# Altium PCB LedMatrix.PcbDoc (part 3 of 3)
Units mm, origin at the board's own origin, x right, y up, seen from the top; angles counter-clockwise.
Board outline 35.93 x 53 mm, 2 copper layers (Top Layer, Bottom Layer), stack 1.611 mm thick; 215 components, 212 nets, 670 pads, 259 vias.
Unrouted connection lines stored in the file: 107.
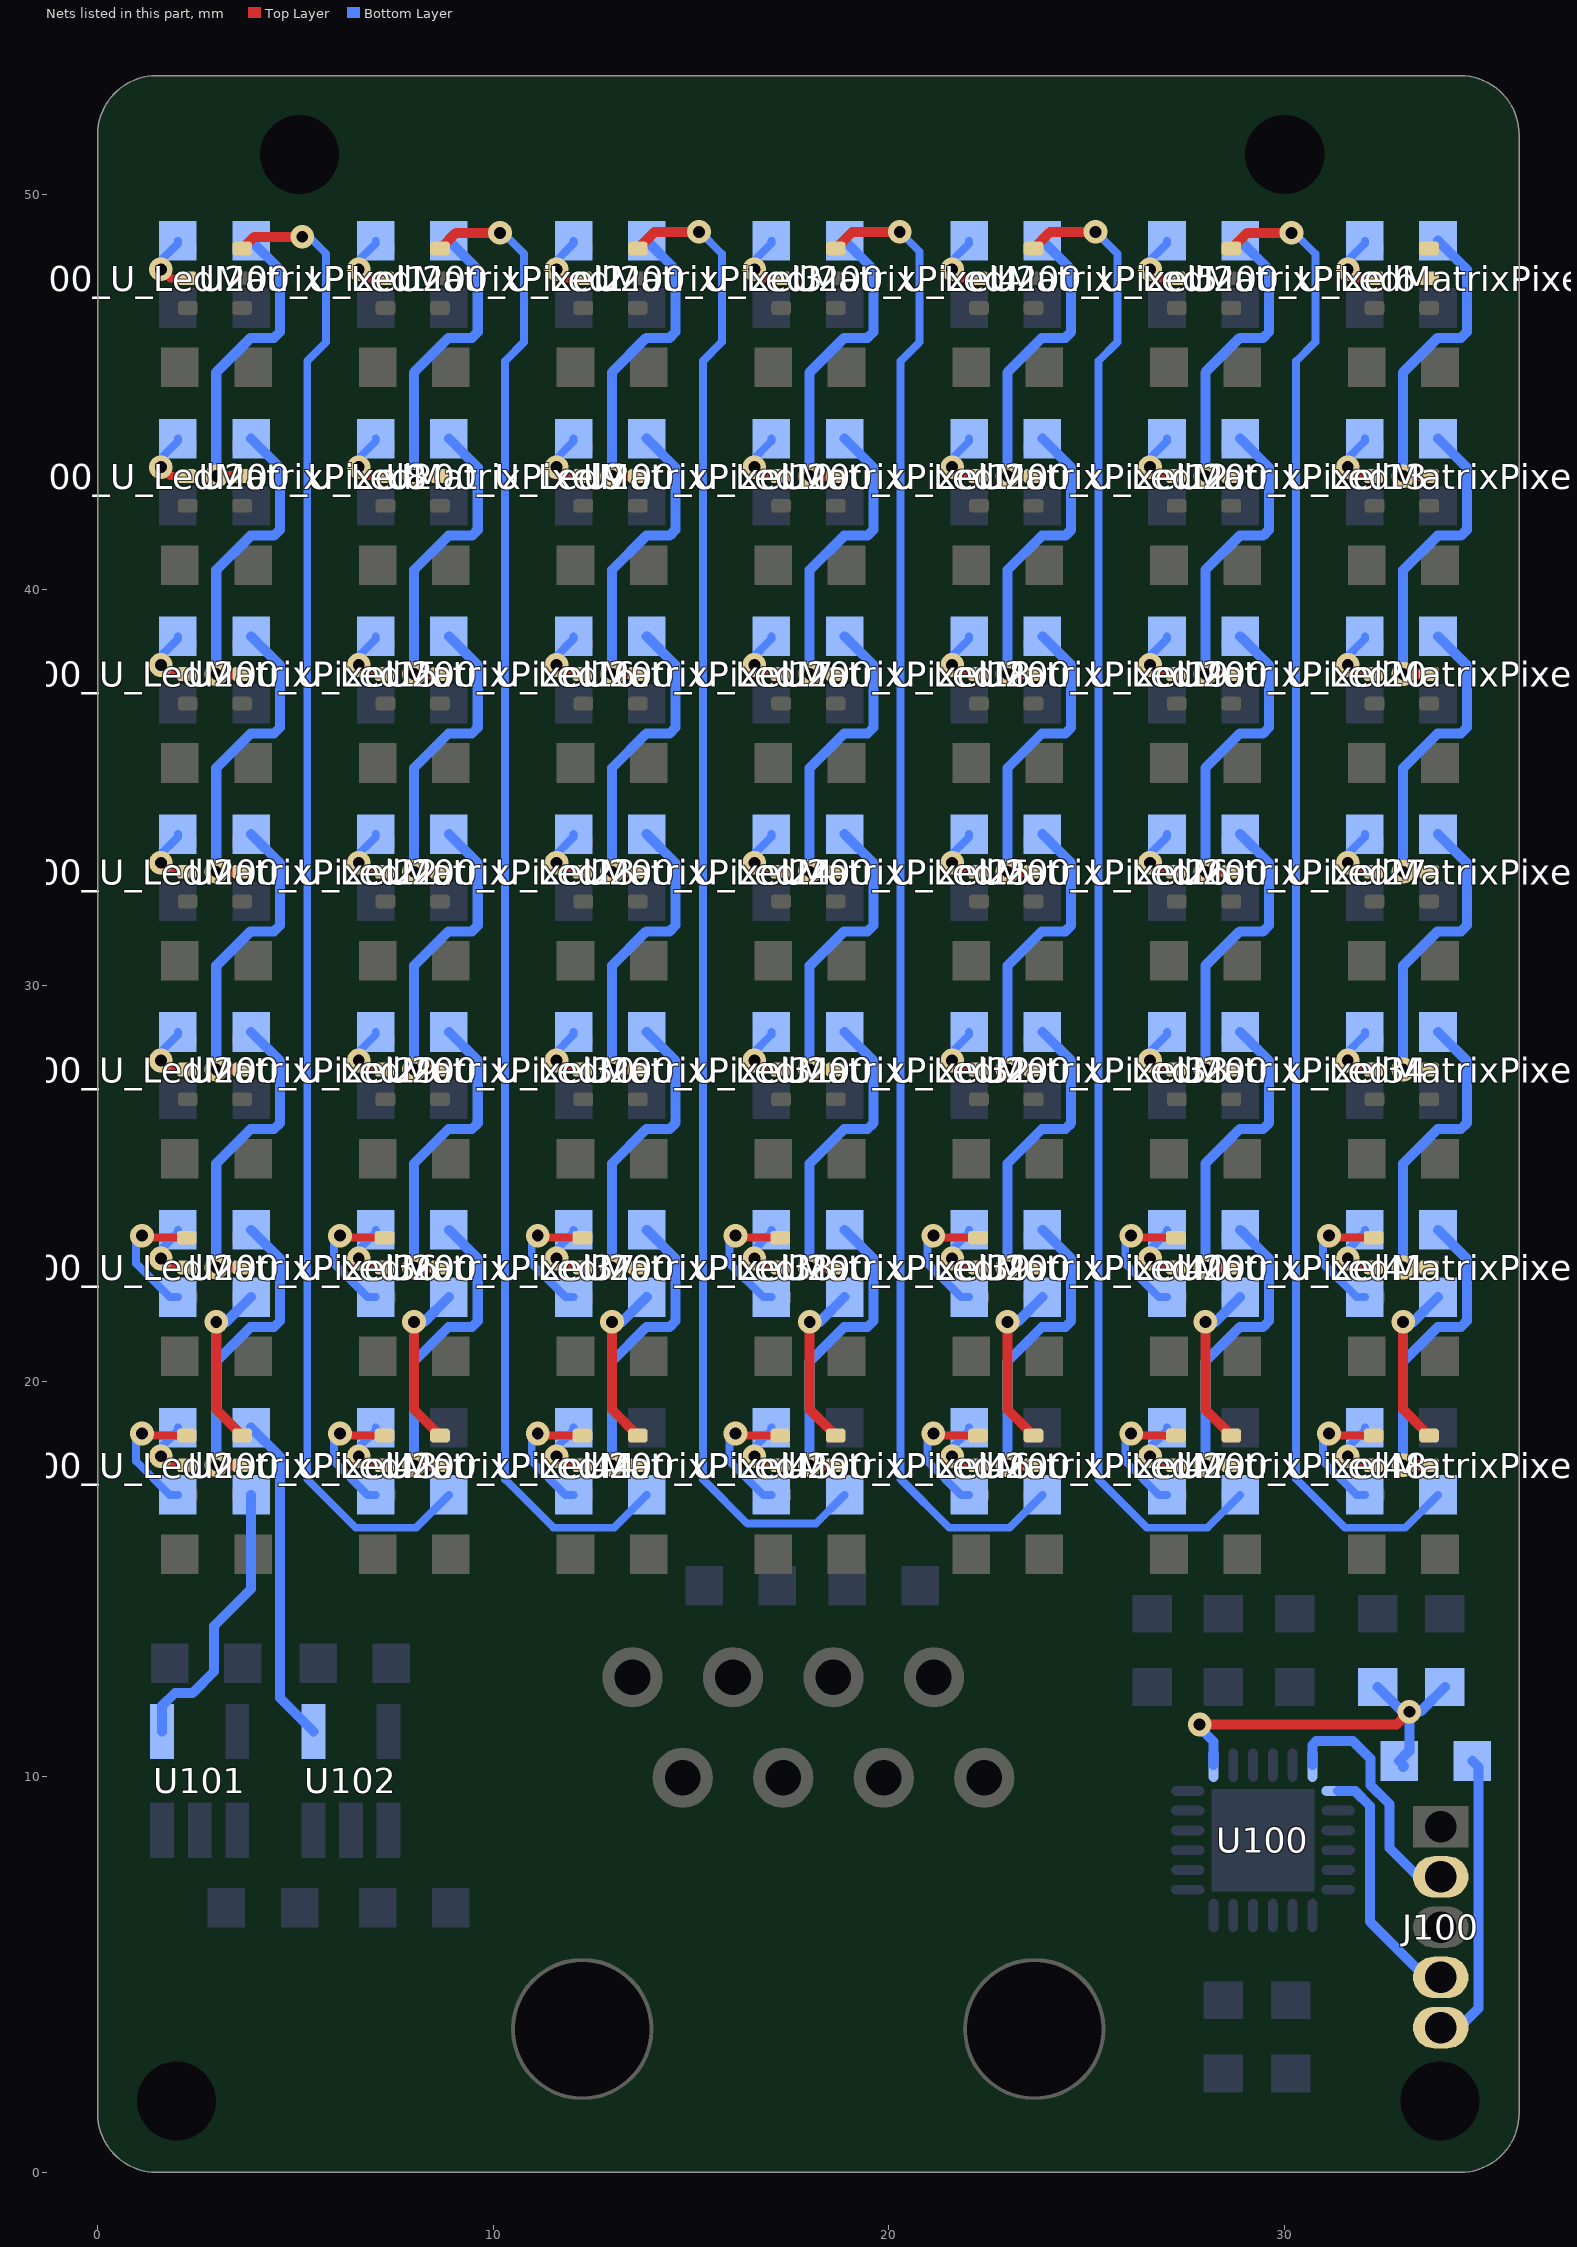
[diagram p3: the nets of this part, all layers, seen from the top]

## Via types
v1: diameter 0.6, hole 0.3, Top Layer to Bottom Layer, tented both sides, 255 vias
v2: diameter 0.5, hole 0.2, Top Layer to Bottom Layer, tented both sides, 4 vias

## Nets (pads, with @x,y where several pads share a name; then routed paths per layer and width w, separated by ;. In a path a pad name is that pad's centre, name@x,y a point inside that pad or via, vN(x,y) a via of type N, cw(c..) or ccw(c..) an arc to the next point about the centre after c; other vN are vias at no path point) (continued)
NetR200_U_LedMatrixPixel36_1: R200_U_LedMatrixPixel36.1 U200_U_LedMatrixPixel43.6 | length 4.3
  Top Layer w0.254: v1(3,21.5) 3,19.281 U200_U_LedMatrixPixel43.6@3.656,18.625
  Bottom Layer w0.254: v1(3,21.5) 3.256,21.5 R200_U_LedMatrixPixel36.1@3.881,22.125
NetR200_U_LedMatrixPixel36_2: R200_U_LedMatrixPixel36.2 U200_U_LedMatrixPixel36.1 | length 3.3
  Top Layer w0.2: v1(1.125,23.677) 1.125,23.65 1.15,23.625 1.378,23.625 1.382,23.629 2.252,23.629 U200_U_LedMatrixPixel36.1@2.256,23.625
  Bottom Layer w0.2: v1(1.125,23.677) 0.975,23.527 0.975,22.975 1.825,22.125 R200_U_LedMatrixPixel36.2@2.031,22.125
NetR200_U_LedMatrixPixel37_1: R200_U_LedMatrixPixel37.1 U200_U_LedMatrixPixel44.6 | length 4.3
  Top Layer w0.254: v1(8,21.5) 8,19.281 U200_U_LedMatrixPixel44.6@8.656,18.625
  Bottom Layer w0.254: v1(8,21.5) 8.256,21.5 R200_U_LedMatrixPixel37.1@8.881,22.125
NetR200_U_LedMatrixPixel37_2: R200_U_LedMatrixPixel37.2 U200_U_LedMatrixPixel37.1 | length 3.3
  Top Layer w0.2: v1(6.125,23.677) 6.125,23.65 6.15,23.625 6.378,23.625 6.382,23.629 7.252,23.629 U200_U_LedMatrixPixel37.1@7.256,23.625
  Bottom Layer w0.2: v1(6.125,23.677) 5.975,23.527 5.975,22.975 6.825,22.125 R200_U_LedMatrixPixel37.2@7.031,22.125
NetR200_U_LedMatrixPixel38_1: R200_U_LedMatrixPixel38.1 U200_U_LedMatrixPixel45.6 | length 4.3
  Top Layer w0.254: v1(13,21.5) 13,19.281 U200_U_LedMatrixPixel45.6@13.656,18.625
  Bottom Layer w0.254: v1(13,21.5) 13.256,21.5 R200_U_LedMatrixPixel38.1@13.881,22.125
NetR200_U_LedMatrixPixel38_2: R200_U_LedMatrixPixel38.2 U200_U_LedMatrixPixel38.1 | length 3.3
  Top Layer w0.2: v1(11.125,23.677) 11.125,23.65 11.15,23.625 11.378,23.625 11.382,23.629 12.252,23.629 U200_U_LedMatrixPixel38.1@12.256,23.625
  Bottom Layer w0.2: v1(11.125,23.677) 10.975,23.527 10.975,22.975 11.825,22.125 R200_U_LedMatrixPixel38.2@12.031,22.125
NetR200_U_LedMatrixPixel39_1: R200_U_LedMatrixPixel39.1 U200_U_LedMatrixPixel46.6 | length 4.3
  Top Layer w0.254: v1(18,21.5) 18,19.281 U200_U_LedMatrixPixel46.6@18.656,18.625
  Bottom Layer w0.254: v1(18,21.5) 18.256,21.5 R200_U_LedMatrixPixel39.1@18.881,22.125
NetR200_U_LedMatrixPixel39_2: R200_U_LedMatrixPixel39.2 U200_U_LedMatrixPixel39.1 | length 3.3
  Top Layer w0.2: v1(16.125,23.677) 16.125,23.65 16.15,23.625 16.378,23.625 16.382,23.629 17.252,23.629 U200_U_LedMatrixPixel39.1@17.256,23.625
  Bottom Layer w0.2: v1(16.125,23.677) 15.975,23.527 15.975,22.975 16.825,22.125 R200_U_LedMatrixPixel39.2@17.031,22.125
NetR200_U_LedMatrixPixel40_1: R200_U_LedMatrixPixel40.1 U200_U_LedMatrixPixel47.6 | length 4.3
  Top Layer w0.254: v1(23,21.5) 23,19.281 U200_U_LedMatrixPixel47.6@23.656,18.625
  Bottom Layer w0.254: v1(23,21.5) 23.256,21.5 R200_U_LedMatrixPixel40.1@23.881,22.125
NetR200_U_LedMatrixPixel40_2: R200_U_LedMatrixPixel40.2 U200_U_LedMatrixPixel40.1 | length 3.3
  Top Layer w0.2: v1(21.125,23.677) 21.125,23.65 21.15,23.625 21.378,23.625 21.382,23.629 22.252,23.629 U200_U_LedMatrixPixel40.1@22.256,23.625
  Bottom Layer w0.2: v1(21.125,23.677) 20.975,23.527 20.975,22.975 21.825,22.125 R200_U_LedMatrixPixel40.2@22.031,22.125
NetR200_U_LedMatrixPixel41_1: R200_U_LedMatrixPixel41.1 U200_U_LedMatrixPixel48.6 | length 4.3
  Top Layer w0.254: v1(28,21.5) 28,19.281 U200_U_LedMatrixPixel48.6@28.656,18.625
  Bottom Layer w0.254: v1(28,21.5) 28.256,21.5 R200_U_LedMatrixPixel41.1@28.881,22.125
NetR200_U_LedMatrixPixel41_2: R200_U_LedMatrixPixel41.2 U200_U_LedMatrixPixel41.1 | length 3.3
  Top Layer w0.2: v1(26.125,23.677) 26.125,23.65 26.15,23.625 26.378,23.625 26.382,23.629 27.252,23.629 U200_U_LedMatrixPixel41.1@27.256,23.625
  Bottom Layer w0.2: v1(26.125,23.677) 25.975,23.527 25.975,22.975 26.825,22.125 R200_U_LedMatrixPixel41.2@27.031,22.125
NetR200_U_LedMatrixPixel42_1: R200_U_LedMatrixPixel42.1 U200_U_LedMatrixPixel49.6 | length 4.3
  Top Layer w0.254: v1(33,21.5) 33,19.281 U200_U_LedMatrixPixel49.6@33.656,18.625
  Bottom Layer w0.254: v1(33,21.5) 33.256,21.5 R200_U_LedMatrixPixel42.1@33.881,22.125
NetR200_U_LedMatrixPixel42_2: R200_U_LedMatrixPixel42.2 U200_U_LedMatrixPixel42.1 | length 3.3
  Top Layer w0.2: v1(31.125,23.677) 31.125,23.65 31.15,23.625 31.378,23.625 31.382,23.629 32.252,23.629 U200_U_LedMatrixPixel42.1@32.256,23.625
  Bottom Layer w0.2: v1(31.125,23.677) 30.975,23.527 30.975,22.975 31.825,22.125 R200_U_LedMatrixPixel42.2@32.031,22.125
NetR200_U_LedMatrixPixel43_1: R200_U_LedMatrixPixel43.1 U101.4 | length 7.2
  Bottom Layer w0.254: U101.4@1.631,11.145 1.631,11.797 1.955,12.121 2.405,12.121 2.946,12.662 2.946,13.81 3.881,14.745 R200_U_LedMatrixPixel43.1@3.881,17.125
NetR200_U_LedMatrixPixel43_2: R200_U_LedMatrixPixel43.2 U200_U_LedMatrixPixel43.1 | length 3.3
  Top Layer w0.2: v1(1.125,18.677) 1.125,18.65 1.15,18.625 1.378,18.625 1.382,18.629 2.252,18.629 U200_U_LedMatrixPixel43.1@2.256,18.625
  Bottom Layer w0.2: v1(1.125,18.677) 0.975,18.527 0.975,17.975 1.825,17.125 R200_U_LedMatrixPixel43.2@2.031,17.125
NetR200_U_LedMatrixPixel44_2: R200_U_LedMatrixPixel44.2 U200_U_LedMatrixPixel44.1 | length 3.3
  Top Layer w0.2: v1(6.125,18.677) 6.125,18.65 6.15,18.625 6.378,18.625 6.382,18.629 7.252,18.629 U200_U_LedMatrixPixel44.1@7.256,18.625
  Bottom Layer w0.2: v1(6.125,18.677) 5.975,18.527 5.975,17.975 6.825,17.125 R200_U_LedMatrixPixel44.2@7.031,17.125
NetR200_U_LedMatrixPixel45_2: R200_U_LedMatrixPixel45.2 U200_U_LedMatrixPixel45.1 | length 3.3
  Top Layer w0.2: v1(11.125,18.677) 11.125,18.65 11.15,18.625 11.378,18.625 11.382,18.629 12.252,18.629 U200_U_LedMatrixPixel45.1@12.256,18.625
  Bottom Layer w0.2: v1(11.125,18.677) 10.975,18.527 10.975,17.975 11.825,17.125 R200_U_LedMatrixPixel45.2@12.031,17.125
NetR200_U_LedMatrixPixel46_2: R200_U_LedMatrixPixel46.2 U200_U_LedMatrixPixel46.1 | length 3.3
  Top Layer w0.2: v1(16.125,18.677) 16.125,18.65 16.15,18.625 16.378,18.625 16.382,18.629 17.252,18.629 U200_U_LedMatrixPixel46.1@17.256,18.625
  Bottom Layer w0.2: v1(16.125,18.677) 15.975,18.527 15.975,17.975 16.825,17.125 R200_U_LedMatrixPixel46.2@17.031,17.125
NetR200_U_LedMatrixPixel47_2: R200_U_LedMatrixPixel47.2 U200_U_LedMatrixPixel47.1 | length 3.3
  Top Layer w0.2: v1(21.125,18.677) 21.125,18.65 21.15,18.625 21.378,18.625 21.382,18.629 22.252,18.629 U200_U_LedMatrixPixel47.1@22.256,18.625
  Bottom Layer w0.2: v1(21.125,18.677) 20.975,18.527 20.975,17.975 21.825,17.125 R200_U_LedMatrixPixel47.2@22.031,17.125
NetR200_U_LedMatrixPixel48_2: R200_U_LedMatrixPixel48.2 U200_U_LedMatrixPixel48.1 | length 3.3
  Top Layer w0.2: v1(26.125,18.677) 26.125,18.65 26.15,18.625 26.378,18.625 26.382,18.629 27.252,18.629 U200_U_LedMatrixPixel48.1@27.256,18.625
  Bottom Layer w0.2: v1(26.125,18.677) 25.975,18.527 25.975,17.975 26.825,17.125 R200_U_LedMatrixPixel48.2@27.031,17.125
NetR200_U_LedMatrixPixel49_2: R200_U_LedMatrixPixel49.2 U200_U_LedMatrixPixel49.1 | length 3.3
  Top Layer w0.2: v1(31.125,18.677) 31.125,18.65 31.15,18.625 31.378,18.625 31.382,18.629 32.252,18.629 U200_U_LedMatrixPixel49.1@32.256,18.625
  Bottom Layer w0.2: v1(31.125,18.677) 30.975,18.527 30.975,17.975 31.825,17.125 R200_U_LedMatrixPixel49.2@32.031,17.125
NetR201_U_LedMatrixPixel1_1: R201_U_LedMatrixPixel1.1 U200_U_LedMatrixPixel8.5 | length 7.9
  Top Layer w0.254: v1(3,42.875) U200_U_LedMatrixPixel8.5@3.656,42.875
  Bottom Layer w0.254: v1(3,42.875) 3,45.5 3.871,46.371 4.461,46.371 4.61,46.52 4.61,48.096 R201_U_LedMatrixPixel1.1@3.881,48.825
NetR201_U_LedMatrixPixel1_2: R201_U_LedMatrixPixel1.2 U200_U_LedMatrixPixel1.2 | length 1.8
  Top Layer w0.2: v1@1.527,48.102 v1(1.6,48.102) 1.827,47.875 U200_U_LedMatrixPixel1.2@2.256,47.875
  Bottom Layer w0.2: v1(1.6,48.102) 1.6,48.181 1.528,48.253 2.031,48.756 R201_U_LedMatrixPixel1.2@2.031,48.825
NetR201_U_LedMatrixPixel2_1: R201_U_LedMatrixPixel2.1 U200_U_LedMatrixPixel9.5 | length 7.9
  Top Layer w0.254: v1(8,42.875) U200_U_LedMatrixPixel9.5@8.656,42.875
  Bottom Layer w0.254: v1(8,42.875) 8,45.5 8.871,46.371 9.461,46.371 9.61,46.52 9.61,48.096 R201_U_LedMatrixPixel2.1@8.881,48.825
NetR201_U_LedMatrixPixel2_2: R201_U_LedMatrixPixel2.2 U200_U_LedMatrixPixel2.2 | length 1.8
  Top Layer w0.2: v1@6.527,48.102 v1(6.6,48.102) 6.827,47.875 U200_U_LedMatrixPixel2.2@7.256,47.875
  Bottom Layer w0.2: v1(6.6,48.102) 6.6,48.181 6.528,48.253 7.031,48.756 R201_U_LedMatrixPixel2.2@7.031,48.825
NetR201_U_LedMatrixPixel3_1: R201_U_LedMatrixPixel3.1 U200_U_LedMatrixPixel10.5 | length 7.9
  Top Layer w0.254: v1(13,42.875) U200_U_LedMatrixPixel10.5@13.656,42.875
  Bottom Layer w0.254: v1(13,42.875) 13,45.5 13.871,46.371 14.461,46.371 14.61,46.52 14.61,48.096 R201_U_LedMatrixPixel3.1@13.881,48.825
NetR201_U_LedMatrixPixel3_2: R201_U_LedMatrixPixel3.2 U200_U_LedMatrixPixel3.2 | length 1.8
  Top Layer w0.2: v1@11.527,48.102 v1(11.6,48.102) 11.827,47.875 U200_U_LedMatrixPixel3.2@12.256,47.875
  Bottom Layer w0.2: v1(11.6,48.102) 11.6,48.181 11.528,48.253 12.031,48.756 R201_U_LedMatrixPixel3.2@12.031,48.825
NetR201_U_LedMatrixPixel4_1: R201_U_LedMatrixPixel4.1 U200_U_LedMatrixPixel11.5 | length 7.9
  Top Layer w0.254: v1(18,42.875) U200_U_LedMatrixPixel11.5@18.656,42.875
  Bottom Layer w0.254: v1(18,42.875) 18,45.5 18.871,46.371 19.461,46.371 19.61,46.52 19.61,48.096 R201_U_LedMatrixPixel4.1@18.881,48.825
NetR201_U_LedMatrixPixel4_2: R201_U_LedMatrixPixel4.2 U200_U_LedMatrixPixel4.2 | length 1.8
  Top Layer w0.2: v1@16.527,48.102 v1(16.6,48.102) 16.827,47.875 U200_U_LedMatrixPixel4.2@17.256,47.875
  Bottom Layer w0.2: v1(16.6,48.102) 16.6,48.181 16.528,48.253 17.031,48.756 R201_U_LedMatrixPixel4.2@17.031,48.825
NetR201_U_LedMatrixPixel5_1: R201_U_LedMatrixPixel5.1 U200_U_LedMatrixPixel12.5 | length 7.9
  Top Layer w0.254: v1(23,42.875) U200_U_LedMatrixPixel12.5@23.656,42.875
  Bottom Layer w0.254: v1(23,42.875) 23,45.5 23.871,46.371 24.461,46.371 24.61,46.52 24.61,48.096 R201_U_LedMatrixPixel5.1@23.881,48.825
NetR201_U_LedMatrixPixel5_2: R201_U_LedMatrixPixel5.2 U200_U_LedMatrixPixel5.2 | length 1.8
  Top Layer w0.2: v1@21.527,48.102 v1(21.6,48.102) 21.827,47.875 U200_U_LedMatrixPixel5.2@22.256,47.875
  Bottom Layer w0.2: v1(21.6,48.102) 21.6,48.181 21.528,48.253 22.031,48.756 R201_U_LedMatrixPixel5.2@22.031,48.825
NetR201_U_LedMatrixPixel6_1: R201_U_LedMatrixPixel6.1 U200_U_LedMatrixPixel13.5 | length 7.9
  Top Layer w0.254: v1(28,42.875) U200_U_LedMatrixPixel13.5@28.656,42.875
  Bottom Layer w0.254: v1(28,42.875) 28,45.5 28.871,46.371 29.461,46.371 29.61,46.52 29.61,48.096 R201_U_LedMatrixPixel6.1@28.881,48.825
NetR201_U_LedMatrixPixel6_2: R201_U_LedMatrixPixel6.2 U200_U_LedMatrixPixel6.2 | length 1.8
  Top Layer w0.2: v1@26.527,48.102 v1(26.6,48.102) 26.827,47.875 U200_U_LedMatrixPixel6.2@27.256,47.875
  Bottom Layer w0.2: v1(26.6,48.102) 26.6,48.181 26.528,48.253 27.031,48.756 R201_U_LedMatrixPixel6.2@27.031,48.825
NetR201_U_LedMatrixPixel7_1: R201_U_LedMatrixPixel7.1 U200_U_LedMatrixPixel14.5 | length 7.9
  Top Layer w0.254: v1(33,42.875) U200_U_LedMatrixPixel14.5@33.656,42.875
  Bottom Layer w0.254: v1(33,42.875) 33,45.5 33.871,46.371 34.461,46.371 34.61,46.52 34.61,48.096 R201_U_LedMatrixPixel7.1@33.881,48.825
NetR201_U_LedMatrixPixel7_2: R201_U_LedMatrixPixel7.2 U200_U_LedMatrixPixel7.2 | length 1.8
  Top Layer w0.2: v1@31.527,48.102 v1(31.6,48.102) 31.827,47.875 U200_U_LedMatrixPixel7.2@32.256,47.875
  Bottom Layer w0.2: v1(31.6,48.102) 31.6,48.181 31.528,48.253 32.031,48.756 R201_U_LedMatrixPixel7.2@32.031,48.825
NetR201_U_LedMatrixPixel8_1: R201_U_LedMatrixPixel8.1 U200_U_LedMatrixPixel15.5 | length 7.9
  Top Layer w0.254: v1(3,37.875) U200_U_LedMatrixPixel15.5@3.656,37.875
  Bottom Layer w0.254: v1(3,37.875) 3,40.5 3.871,41.371 4.461,41.371 4.61,41.52 4.61,43.096 R201_U_LedMatrixPixel8.1@3.881,43.825
NetR201_U_LedMatrixPixel8_2: R201_U_LedMatrixPixel8.2 U200_U_LedMatrixPixel8.2 | length 1.8
  Top Layer w0.2: v1@1.527,43.102 v1(1.6,43.102) 1.827,42.875 U200_U_LedMatrixPixel8.2@2.256,42.875
  Bottom Layer w0.2: v1(1.6,43.102) 1.6,43.181 1.528,43.253 2.031,43.756 R201_U_LedMatrixPixel8.2@2.031,43.825
NetR201_U_LedMatrixPixel9_1: R201_U_LedMatrixPixel9.1 U200_U_LedMatrixPixel16.5 | length 7.9
  Top Layer w0.254: v1(8,37.875) U200_U_LedMatrixPixel16.5@8.656,37.875
  Bottom Layer w0.254: v1(8,37.875) 8,40.5 8.871,41.371 9.461,41.371 9.61,41.52 9.61,43.096 R201_U_LedMatrixPixel9.1@8.881,43.825
NetR201_U_LedMatrixPixel9_2: R201_U_LedMatrixPixel9.2 U200_U_LedMatrixPixel9.2 | length 1.8
  Top Layer w0.2: v1@6.527,43.102 v1(6.6,43.102) 6.827,42.875 U200_U_LedMatrixPixel9.2@7.256,42.875
  Bottom Layer w0.2: v1(6.6,43.102) 6.6,43.181 6.528,43.253 7.031,43.756 R201_U_LedMatrixPixel9.2@7.031,43.825
NetR201_U_LedMatrixPixel10_1: R201_U_LedMatrixPixel10.1 U200_U_LedMatrixPixel17.5 | length 7.9
  Top Layer w0.254: v1(13,37.875) U200_U_LedMatrixPixel17.5@13.656,37.875
  Bottom Layer w0.254: v1(13,37.875) 13,40.5 13.871,41.371 14.461,41.371 14.61,41.52 14.61,43.096 R201_U_LedMatrixPixel10.1@13.881,43.825
NetR201_U_LedMatrixPixel10_2: R201_U_LedMatrixPixel10.2 U200_U_LedMatrixPixel10.2 | length 1.8
  Top Layer w0.2: v1@11.527,43.102 v1(11.6,43.102) 11.827,42.875 U200_U_LedMatrixPixel10.2@12.256,42.875
  Bottom Layer w0.2: v1(11.6,43.102) 11.6,43.181 11.528,43.253 12.031,43.756 R201_U_LedMatrixPixel10.2@12.031,43.825
NetR201_U_LedMatrixPixel11_1: R201_U_LedMatrixPixel11.1 U200_U_LedMatrixPixel18.5 | length 7.9
  Top Layer w0.254: v1(18,37.875) U200_U_LedMatrixPixel18.5@18.656,37.875
  Bottom Layer w0.254: v1(18,37.875) 18,40.5 18.871,41.371 19.461,41.371 19.61,41.52 19.61,43.096 R201_U_LedMatrixPixel11.1@18.881,43.825
NetR201_U_LedMatrixPixel11_2: R201_U_LedMatrixPixel11.2 U200_U_LedMatrixPixel11.2 | length 1.8
  Top Layer w0.2: v1@16.527,43.102 v1(16.6,43.102) 16.827,42.875 U200_U_LedMatrixPixel11.2@17.256,42.875
  Bottom Layer w0.2: v1(16.6,43.102) 16.6,43.181 16.528,43.253 17.031,43.756 R201_U_LedMatrixPixel11.2@17.031,43.825
NetR201_U_LedMatrixPixel12_1: R201_U_LedMatrixPixel12.1 U200_U_LedMatrixPixel19.5 | length 7.9
  Top Layer w0.254: v1(23,37.875) U200_U_LedMatrixPixel19.5@23.656,37.875
  Bottom Layer w0.254: v1(23,37.875) 23,40.5 23.871,41.371 24.461,41.371 24.61,41.52 24.61,43.096 R201_U_LedMatrixPixel12.1@23.881,43.825
NetR201_U_LedMatrixPixel12_2: R201_U_LedMatrixPixel12.2 U200_U_LedMatrixPixel12.2 | length 1.8
  Top Layer w0.2: v1@21.527,43.102 v1(21.6,43.102) 21.827,42.875 U200_U_LedMatrixPixel12.2@22.256,42.875
  Bottom Layer w0.2: v1(21.6,43.102) 21.6,43.181 21.528,43.253 22.031,43.756 R201_U_LedMatrixPixel12.2@22.031,43.825
NetR201_U_LedMatrixPixel13_1: R201_U_LedMatrixPixel13.1 U200_U_LedMatrixPixel20.5 | length 7.9
  Top Layer w0.254: v1(28,37.875) U200_U_LedMatrixPixel20.5@28.656,37.875
  Bottom Layer w0.254: v1(28,37.875) 28,40.5 28.871,41.371 29.461,41.371 29.61,41.52 29.61,43.096 R201_U_LedMatrixPixel13.1@28.881,43.825
NetR201_U_LedMatrixPixel13_2: R201_U_LedMatrixPixel13.2 U200_U_LedMatrixPixel13.2 | length 1.8
  Top Layer w0.2: v1@26.527,43.102 v1(26.6,43.102) 26.827,42.875 U200_U_LedMatrixPixel13.2@27.256,42.875
  Bottom Layer w0.2: v1(26.6,43.102) 26.6,43.181 26.528,43.253 27.031,43.756 R201_U_LedMatrixPixel13.2@27.031,43.825
NetR201_U_LedMatrixPixel14_1: R201_U_LedMatrixPixel14.1 U200_U_LedMatrixPixel21.5 | length 7.9
  Top Layer w0.254: v1(33,37.875) U200_U_LedMatrixPixel21.5@33.656,37.875
  Bottom Layer w0.254: v1(33,37.875) 33,40.5 33.871,41.371 34.461,41.371 34.61,41.52 34.61,43.096 R201_U_LedMatrixPixel14.1@33.881,43.825
NetR201_U_LedMatrixPixel14_2: R201_U_LedMatrixPixel14.2 U200_U_LedMatrixPixel14.2 | length 1.8
  Top Layer w0.2: v1@31.527,43.102 v1(31.6,43.102) 31.827,42.875 U200_U_LedMatrixPixel14.2@32.256,42.875
  Bottom Layer w0.2: v1(31.6,43.102) 31.6,43.181 31.528,43.253 32.031,43.756 R201_U_LedMatrixPixel14.2@32.031,43.825
NetR201_U_LedMatrixPixel15_1: R201_U_LedMatrixPixel15.1 U200_U_LedMatrixPixel22.5 | length 7.9
  Top Layer w0.254: v1(3,32.875) U200_U_LedMatrixPixel22.5@3.656,32.875
  Bottom Layer w0.254: v1(3,32.875) 3,35.5 3.871,36.371 4.461,36.371 4.61,36.52 4.61,38.096 R201_U_LedMatrixPixel15.1@3.881,38.825
NetR201_U_LedMatrixPixel15_2: R201_U_LedMatrixPixel15.2 U200_U_LedMatrixPixel15.2 | length 1.8
  Top Layer w0.2: v1@1.527,38.102 v1(1.6,38.102) 1.827,37.875 U200_U_LedMatrixPixel15.2@2.256,37.875
  Bottom Layer w0.2: v1(1.6,38.102) 1.6,38.181 1.528,38.253 2.031,38.756 R201_U_LedMatrixPixel15.2@2.031,38.825
NetR201_U_LedMatrixPixel16_1: R201_U_LedMatrixPixel16.1 U200_U_LedMatrixPixel23.5 | length 7.9
  Top Layer w0.254: v1(8,32.875) U200_U_LedMatrixPixel23.5@8.656,32.875
  Bottom Layer w0.254: v1(8,32.875) 8,35.5 8.871,36.371 9.461,36.371 9.61,36.52 9.61,38.096 R201_U_LedMatrixPixel16.1@8.881,38.825
NetR201_U_LedMatrixPixel16_2: R201_U_LedMatrixPixel16.2 U200_U_LedMatrixPixel16.2 | length 1.8
  Top Layer w0.2: v1@6.527,38.102 v1(6.6,38.102) 6.827,37.875 U200_U_LedMatrixPixel16.2@7.256,37.875
  Bottom Layer w0.2: v1(6.6,38.102) 6.6,38.181 6.528,38.253 7.031,38.756 R201_U_LedMatrixPixel16.2@7.031,38.825
NetR201_U_LedMatrixPixel17_1: R201_U_LedMatrixPixel17.1 U200_U_LedMatrixPixel24.5 | length 7.9
  Top Layer w0.254: v1(13,32.875) U200_U_LedMatrixPixel24.5@13.656,32.875
  Bottom Layer w0.254: v1(13,32.875) 13,35.5 13.871,36.371 14.461,36.371 14.61,36.52 14.61,38.096 R201_U_LedMatrixPixel17.1@13.881,38.825
NetR201_U_LedMatrixPixel17_2: R201_U_LedMatrixPixel17.2 U200_U_LedMatrixPixel17.2 | length 1.8
  Top Layer w0.2: v1@11.527,38.102 v1(11.6,38.102) 11.827,37.875 U200_U_LedMatrixPixel17.2@12.256,37.875
  Bottom Layer w0.2: v1(11.6,38.102) 11.6,38.181 11.528,38.253 12.031,38.756 R201_U_LedMatrixPixel17.2@12.031,38.825
NetR201_U_LedMatrixPixel18_1: R201_U_LedMatrixPixel18.1 U200_U_LedMatrixPixel25.5 | length 7.9
  Top Layer w0.254: v1(18,32.875) U200_U_LedMatrixPixel25.5@18.656,32.875
  Bottom Layer w0.254: v1(18,32.875) 18,35.5 18.871,36.371 19.461,36.371 19.61,36.52 19.61,38.096 R201_U_LedMatrixPixel18.1@18.881,38.825
NetR201_U_LedMatrixPixel18_2: R201_U_LedMatrixPixel18.2 U200_U_LedMatrixPixel18.2 | length 1.8
  Top Layer w0.2: v1@16.527,38.102 v1(16.6,38.102) 16.827,37.875 U200_U_LedMatrixPixel18.2@17.256,37.875
  Bottom Layer w0.2: v1(16.6,38.102) 16.6,38.181 16.528,38.253 17.031,38.756 R201_U_LedMatrixPixel18.2@17.031,38.825
NetR201_U_LedMatrixPixel19_1: R201_U_LedMatrixPixel19.1 U200_U_LedMatrixPixel26.5 | length 7.9
  Top Layer w0.254: v1(23,32.875) U200_U_LedMatrixPixel26.5@23.656,32.875
  Bottom Layer w0.254: v1(23,32.875) 23,35.5 23.871,36.371 24.461,36.371 24.61,36.52 24.61,38.096 R201_U_LedMatrixPixel19.1@23.881,38.825
NetR201_U_LedMatrixPixel19_2: R201_U_LedMatrixPixel19.2 U200_U_LedMatrixPixel19.2 | length 1.8
  Top Layer w0.2: v1@21.527,38.102 v1(21.6,38.102) 21.827,37.875 U200_U_LedMatrixPixel19.2@22.256,37.875
  Bottom Layer w0.2: v1(21.6,38.102) 21.6,38.181 21.528,38.253 22.031,38.756 R201_U_LedMatrixPixel19.2@22.031,38.825
NetR201_U_LedMatrixPixel20_1: R201_U_LedMatrixPixel20.1 U200_U_LedMatrixPixel27.5 | length 7.9
  Top Layer w0.254: v1(28,32.875) U200_U_LedMatrixPixel27.5@28.656,32.875
  Bottom Layer w0.254: v1(28,32.875) 28,35.5 28.871,36.371 29.461,36.371 29.61,36.52 29.61,38.096 R201_U_LedMatrixPixel20.1@28.881,38.825
NetR201_U_LedMatrixPixel20_2: R201_U_LedMatrixPixel20.2 U200_U_LedMatrixPixel20.2 | length 1.8
  Top Layer w0.2: v1@26.527,38.102 v1(26.6,38.102) 26.827,37.875 U200_U_LedMatrixPixel20.2@27.256,37.875
  Bottom Layer w0.2: v1(26.6,38.102) 26.6,38.181 26.528,38.253 27.031,38.756 R201_U_LedMatrixPixel20.2@27.031,38.825
NetR201_U_LedMatrixPixel21_1: R201_U_LedMatrixPixel21.1 U200_U_LedMatrixPixel28.5 | length 7.9
  Top Layer w0.254: v1(33,32.875) U200_U_LedMatrixPixel28.5@33.656,32.875
  Bottom Layer w0.254: v1(33,32.875) 33,35.5 33.871,36.371 34.461,36.371 34.61,36.52 34.61,38.096 R201_U_LedMatrixPixel21.1@33.881,38.825
NetR201_U_LedMatrixPixel21_2: R201_U_LedMatrixPixel21.2 U200_U_LedMatrixPixel21.2 | length 1.8
  Top Layer w0.2: v1@31.527,38.102 v1(31.6,38.102) 31.827,37.875 U200_U_LedMatrixPixel21.2@32.256,37.875
  Bottom Layer w0.2: v1(31.6,38.102) 31.6,38.181 31.528,38.253 32.031,38.756 R201_U_LedMatrixPixel21.2@32.031,38.825
NetR201_U_LedMatrixPixel22_1: R201_U_LedMatrixPixel22.1 U200_U_LedMatrixPixel29.5 | length 7.9
  Top Layer w0.254: v1(3,27.875) U200_U_LedMatrixPixel29.5@3.656,27.875
  Bottom Layer w0.254: v1(3,27.875) 3,30.5 3.871,31.371 4.461,31.371 4.61,31.52 4.61,33.096 R201_U_LedMatrixPixel22.1@3.881,33.825
NetR201_U_LedMatrixPixel22_2: R201_U_LedMatrixPixel22.2 U200_U_LedMatrixPixel22.2 | length 1.8
  Top Layer w0.2: v1@1.527,33.102 v1(1.6,33.102) 1.827,32.875 U200_U_LedMatrixPixel22.2@2.256,32.875
  Bottom Layer w0.2: v1(1.6,33.102) 1.6,33.181 1.528,33.253 2.031,33.756 R201_U_LedMatrixPixel22.2@2.031,33.825
NetR201_U_LedMatrixPixel23_1: R201_U_LedMatrixPixel23.1 U200_U_LedMatrixPixel30.5 | length 7.9
  Top Layer w0.254: v1(8,27.875) U200_U_LedMatrixPixel30.5@8.656,27.875
  Bottom Layer w0.254: v1(8,27.875) 8,30.5 8.871,31.371 9.461,31.371 9.61,31.52 9.61,33.096 R201_U_LedMatrixPixel23.1@8.881,33.825
NetR201_U_LedMatrixPixel23_2: R201_U_LedMatrixPixel23.2 U200_U_LedMatrixPixel23.2 | length 1.8
  Top Layer w0.2: v1@6.527,33.102 v1(6.6,33.102) 6.827,32.875 U200_U_LedMatrixPixel23.2@7.256,32.875
  Bottom Layer w0.2: v1(6.6,33.102) 6.6,33.181 6.528,33.253 7.031,33.756 R201_U_LedMatrixPixel23.2@7.031,33.825
NetR201_U_LedMatrixPixel24_1: R201_U_LedMatrixPixel24.1 U200_U_LedMatrixPixel31.5 | length 7.9
  Top Layer w0.254: v1(13,27.875) U200_U_LedMatrixPixel31.5@13.656,27.875
  Bottom Layer w0.254: v1(13,27.875) 13,30.5 13.871,31.371 14.461,31.371 14.61,31.52 14.61,33.096 R201_U_LedMatrixPixel24.1@13.881,33.825
NetR201_U_LedMatrixPixel24_2: R201_U_LedMatrixPixel24.2 U200_U_LedMatrixPixel24.2 | length 1.8
  Top Layer w0.2: v1@11.527,33.102 v1(11.6,33.102) 11.827,32.875 U200_U_LedMatrixPixel24.2@12.256,32.875
  Bottom Layer w0.2: v1(11.6,33.102) 11.6,33.181 11.528,33.253 12.031,33.756 R201_U_LedMatrixPixel24.2@12.031,33.825
NetR201_U_LedMatrixPixel25_1: R201_U_LedMatrixPixel25.1 U200_U_LedMatrixPixel32.5 | length 7.9
  Top Layer w0.254: v1(18,27.875) U200_U_LedMatrixPixel32.5@18.656,27.875
  Bottom Layer w0.254: v1(18,27.875) 18,30.5 18.871,31.371 19.461,31.371 19.61,31.52 19.61,33.096 R201_U_LedMatrixPixel25.1@18.881,33.825
NetR201_U_LedMatrixPixel25_2: R201_U_LedMatrixPixel25.2 U200_U_LedMatrixPixel25.2 | length 1.8
  Top Layer w0.2: v1@16.527,33.102 v1(16.6,33.102) 16.827,32.875 U200_U_LedMatrixPixel25.2@17.256,32.875
  Bottom Layer w0.2: v1(16.6,33.102) 16.6,33.181 16.528,33.253 17.031,33.756 R201_U_LedMatrixPixel25.2@17.031,33.825
NetR201_U_LedMatrixPixel26_1: R201_U_LedMatrixPixel26.1 U200_U_LedMatrixPixel33.5 | length 7.9
  Top Layer w0.254: v1(23,27.875) U200_U_LedMatrixPixel33.5@23.656,27.875
  Bottom Layer w0.254: v1(23,27.875) 23,30.5 23.871,31.371 24.461,31.371 24.61,31.52 24.61,33.096 R201_U_LedMatrixPixel26.1@23.881,33.825
NetR201_U_LedMatrixPixel26_2: R201_U_LedMatrixPixel26.2 U200_U_LedMatrixPixel26.2 | length 1.8
  Top Layer w0.2: v1@21.527,33.102 v1(21.6,33.102) 21.827,32.875 U200_U_LedMatrixPixel26.2@22.256,32.875
  Bottom Layer w0.2: v1(21.6,33.102) 21.6,33.181 21.528,33.253 22.031,33.756 R201_U_LedMatrixPixel26.2@22.031,33.825
NetR201_U_LedMatrixPixel27_1: R201_U_LedMatrixPixel27.1 U200_U_LedMatrixPixel34.5 | length 7.9
  Top Layer w0.254: v1(28,27.875) U200_U_LedMatrixPixel34.5@28.656,27.875
  Bottom Layer w0.254: v1(28,27.875) 28,30.5 28.871,31.371 29.461,31.371 29.61,31.52 29.61,33.096 R201_U_LedMatrixPixel27.1@28.881,33.825
NetR201_U_LedMatrixPixel27_2: R201_U_LedMatrixPixel27.2 U200_U_LedMatrixPixel27.2 | length 1.8
  Top Layer w0.2: v1@26.527,33.102 v1(26.6,33.102) 26.827,32.875 U200_U_LedMatrixPixel27.2@27.256,32.875
  Bottom Layer w0.2: v1(26.6,33.102) 26.6,33.181 26.528,33.253 27.031,33.756 R201_U_LedMatrixPixel27.2@27.031,33.825
NetR201_U_LedMatrixPixel28_1: R201_U_LedMatrixPixel28.1 U200_U_LedMatrixPixel35.5 | length 7.9
  Top Layer w0.254: v1(33,27.875) U200_U_LedMatrixPixel35.5@33.656,27.875
  Bottom Layer w0.254: v1(33,27.875) 33,30.5 33.871,31.371 34.461,31.371 34.61,31.52 34.61,33.096 R201_U_LedMatrixPixel28.1@33.881,33.825
NetR201_U_LedMatrixPixel28_2: R201_U_LedMatrixPixel28.2 U200_U_LedMatrixPixel28.2 | length 1.8
  Top Layer w0.2: v1@31.527,33.102 v1(31.6,33.102) 31.827,32.875 U200_U_LedMatrixPixel28.2@32.256,32.875
  Bottom Layer w0.2: v1(31.6,33.102) 31.6,33.181 31.528,33.253 32.031,33.756 R201_U_LedMatrixPixel28.2@32.031,33.825
NetR201_U_LedMatrixPixel29_1: R201_U_LedMatrixPixel29.1 U200_U_LedMatrixPixel36.5 | length 7.9
  Top Layer w0.254: v1(3,22.875) U200_U_LedMatrixPixel36.5@3.656,22.875
  Bottom Layer w0.254: v1(3,22.875) 3,25.5 3.871,26.371 4.461,26.371 4.61,26.52 4.61,28.096 R201_U_LedMatrixPixel29.1@3.881,28.825
NetR201_U_LedMatrixPixel29_2: R201_U_LedMatrixPixel29.2 U200_U_LedMatrixPixel29.2 | length 1.8
  Top Layer w0.2: v1@1.527,28.102 v1(1.6,28.102) 1.827,27.875 U200_U_LedMatrixPixel29.2@2.256,27.875
  Bottom Layer w0.2: v1(1.6,28.102) 1.6,28.181 1.528,28.253 2.031,28.756 R201_U_LedMatrixPixel29.2@2.031,28.825
NetR201_U_LedMatrixPixel30_1: R201_U_LedMatrixPixel30.1 U200_U_LedMatrixPixel37.5 | length 7.9
  Top Layer w0.254: v1(8,22.875) U200_U_LedMatrixPixel37.5@8.656,22.875
  Bottom Layer w0.254: v1(8,22.875) 8,25.5 8.871,26.371 9.461,26.371 9.61,26.52 9.61,28.096 R201_U_LedMatrixPixel30.1@8.881,28.825
NetR201_U_LedMatrixPixel30_2: R201_U_LedMatrixPixel30.2 U200_U_LedMatrixPixel30.2 | length 1.8
  Top Layer w0.2: v1@6.527,28.102 v1(6.6,28.102) 6.827,27.875 U200_U_LedMatrixPixel30.2@7.256,27.875
  Bottom Layer w0.2: v1(6.6,28.102) 6.6,28.181 6.528,28.253 7.031,28.756 R201_U_LedMatrixPixel30.2@7.031,28.825
NetR201_U_LedMatrixPixel31_1: R201_U_LedMatrixPixel31.1 U200_U_LedMatrixPixel38.5 | length 7.9
  Top Layer w0.254: v1(13,22.875) U200_U_LedMatrixPixel38.5@13.656,22.875
  Bottom Layer w0.254: v1(13,22.875) 13,25.5 13.871,26.371 14.461,26.371 14.61,26.52 14.61,28.096 R201_U_LedMatrixPixel31.1@13.881,28.825
NetR201_U_LedMatrixPixel31_2: R201_U_LedMatrixPixel31.2 U200_U_LedMatrixPixel31.2 | length 1.8
  Top Layer w0.2: v1@11.527,28.102 v1(11.6,28.102) 11.827,27.875 U200_U_LedMatrixPixel31.2@12.256,27.875
  Bottom Layer w0.2: v1(11.6,28.102) 11.6,28.181 11.528,28.253 12.031,28.756 R201_U_LedMatrixPixel31.2@12.031,28.825
NetR201_U_LedMatrixPixel32_1: R201_U_LedMatrixPixel32.1 U200_U_LedMatrixPixel39.5 | length 7.9
  Top Layer w0.254: v1(18,22.875) U200_U_LedMatrixPixel39.5@18.656,22.875
  Bottom Layer w0.254: v1(18,22.875) 18,25.5 18.871,26.371 19.461,26.371 19.61,26.52 19.61,28.096 R201_U_LedMatrixPixel32.1@18.881,28.825
NetR201_U_LedMatrixPixel32_2: R201_U_LedMatrixPixel32.2 U200_U_LedMatrixPixel32.2 | length 1.8
  Top Layer w0.2: v1@16.527,28.102 v1(16.6,28.102) 16.827,27.875 U200_U_LedMatrixPixel32.2@17.256,27.875
  Bottom Layer w0.2: v1(16.6,28.102) 16.6,28.181 16.528,28.253 17.031,28.756 R201_U_LedMatrixPixel32.2@17.031,28.825
NetR201_U_LedMatrixPixel33_1: R201_U_LedMatrixPixel33.1 U200_U_LedMatrixPixel40.5 | length 7.9
  Top Layer w0.254: v1(23,22.875) U200_U_LedMatrixPixel40.5@23.656,22.875
  Bottom Layer w0.254: v1(23,22.875) 23,25.5 23.871,26.371 24.461,26.371 24.61,26.52 24.61,28.096 R201_U_LedMatrixPixel33.1@23.881,28.825
NetR201_U_LedMatrixPixel33_2: R201_U_LedMatrixPixel33.2 U200_U_LedMatrixPixel33.2 | length 1.8
  Top Layer w0.2: v1@21.527,28.102 v1(21.6,28.102) 21.827,27.875 U200_U_LedMatrixPixel33.2@22.256,27.875
  Bottom Layer w0.2: v1(21.6,28.102) 21.6,28.181 21.528,28.253 22.031,28.756 R201_U_LedMatrixPixel33.2@22.031,28.825
NetR201_U_LedMatrixPixel34_1: R201_U_LedMatrixPixel34.1 U200_U_LedMatrixPixel41.5 | length 7.9
  Top Layer w0.254: v1(28,22.875) U200_U_LedMatrixPixel41.5@28.656,22.875
  Bottom Layer w0.254: v1(28,22.875) 28,25.5 28.871,26.371 29.461,26.371 29.61,26.52 29.61,28.096 R201_U_LedMatrixPixel34.1@28.881,28.825
NetR201_U_LedMatrixPixel34_2: R201_U_LedMatrixPixel34.2 U200_U_LedMatrixPixel34.2 | length 1.8
  Top Layer w0.2: v1@26.527,28.102 v1(26.6,28.102) 26.827,27.875 U200_U_LedMatrixPixel34.2@27.256,27.875
  Bottom Layer w0.2: v1(26.6,28.102) 26.6,28.181 26.528,28.253 27.031,28.756 R201_U_LedMatrixPixel34.2@27.031,28.825
NetR201_U_LedMatrixPixel35_1: R201_U_LedMatrixPixel35.1 U200_U_LedMatrixPixel42.5 | length 7.9
  Top Layer w0.254: v1(33,22.875) U200_U_LedMatrixPixel42.5@33.656,22.875
  Bottom Layer w0.254: v1(33,22.875) 33,25.5 33.871,26.371 34.461,26.371 34.61,26.52 34.61,28.096 R201_U_LedMatrixPixel35.1@33.881,28.825
NetR201_U_LedMatrixPixel35_2: R201_U_LedMatrixPixel35.2 U200_U_LedMatrixPixel35.2 | length 1.8
  Top Layer w0.2: v1@31.527,28.102 v1(31.6,28.102) 31.827,27.875 U200_U_LedMatrixPixel35.2@32.256,27.875
  Bottom Layer w0.2: v1(31.6,28.102) 31.6,28.181 31.528,28.253 32.031,28.756 R201_U_LedMatrixPixel35.2@32.031,28.825
NetR201_U_LedMatrixPixel36_1: R201_U_LedMatrixPixel36.1 U200_U_LedMatrixPixel43.5 | length 7.9
  Top Layer w0.254: v1(3,17.875) U200_U_LedMatrixPixel43.5@3.656,17.875
  Bottom Layer w0.254: v1(3,17.875) 3,20.5 3.871,21.371 4.461,21.371 4.61,21.52 4.61,23.096 R201_U_LedMatrixPixel36.1@3.881,23.825
NetR201_U_LedMatrixPixel36_2: R201_U_LedMatrixPixel36.2 U200_U_LedMatrixPixel36.2 | length 1.8
  Top Layer w0.2: v1@1.527,23.102 v1(1.6,23.102) 1.827,22.875 U200_U_LedMatrixPixel36.2@2.256,22.875
  Bottom Layer w0.2: v1(1.6,23.102) 1.6,23.181 1.528,23.253 2.031,23.756 R201_U_LedMatrixPixel36.2@2.031,23.825
NetR201_U_LedMatrixPixel37_1: R201_U_LedMatrixPixel37.1 U200_U_LedMatrixPixel44.5 | length 7.9
  Top Layer w0.254: v1(8,17.875) U200_U_LedMatrixPixel44.5@8.656,17.875
  Bottom Layer w0.254: v1(8,17.875) 8,20.5 8.871,21.371 9.461,21.371 9.61,21.52 9.61,23.096 R201_U_LedMatrixPixel37.1@8.881,23.825
NetR201_U_LedMatrixPixel37_2: R201_U_LedMatrixPixel37.2 U200_U_LedMatrixPixel37.2 | length 1.8
  Top Layer w0.2: v1@6.527,23.102 v1(6.6,23.102) 6.827,22.875 U200_U_LedMatrixPixel37.2@7.256,22.875
  Bottom Layer w0.2: v1(6.6,23.102) 6.6,23.181 6.528,23.253 7.031,23.756 R201_U_LedMatrixPixel37.2@7.031,23.825
NetR201_U_LedMatrixPixel38_1: R201_U_LedMatrixPixel38.1 U200_U_LedMatrixPixel45.5 | length 7.9
  Top Layer w0.254: v1(13,17.875) U200_U_LedMatrixPixel45.5@13.656,17.875
  Bottom Layer w0.254: v1(13,17.875) 13,20.5 13.871,21.371 14.461,21.371 14.61,21.52 14.61,23.096 R201_U_LedMatrixPixel38.1@13.881,23.825
NetR201_U_LedMatrixPixel38_2: R201_U_LedMatrixPixel38.2 U200_U_LedMatrixPixel38.2 | length 1.8
  Top Layer w0.2: v1@11.527,23.102 v1(11.6,23.102) 11.827,22.875 U200_U_LedMatrixPixel38.2@12.256,22.875
  Bottom Layer w0.2: v1(11.6,23.102) 11.6,23.181 11.528,23.253 12.031,23.756 R201_U_LedMatrixPixel38.2@12.031,23.825
NetR201_U_LedMatrixPixel39_1: R201_U_LedMatrixPixel39.1 U200_U_LedMatrixPixel46.5 | length 7.9
  Top Layer w0.254: v1(18,17.875) U200_U_LedMatrixPixel46.5@18.656,17.875
  Bottom Layer w0.254: v1(18,17.875) 18,20.5 18.871,21.371 19.461,21.371 19.61,21.52 19.61,23.096 R201_U_LedMatrixPixel39.1@18.881,23.825
NetR201_U_LedMatrixPixel39_2: R201_U_LedMatrixPixel39.2 U200_U_LedMatrixPixel39.2 | length 1.8
  Top Layer w0.2: v1@16.527,23.102 v1(16.6,23.102) 16.827,22.875 U200_U_LedMatrixPixel39.2@17.256,22.875
  Bottom Layer w0.2: v1(16.6,23.102) 16.6,23.181 16.528,23.253 17.031,23.756 R201_U_LedMatrixPixel39.2@17.031,23.825
NetR201_U_LedMatrixPixel40_1: R201_U_LedMatrixPixel40.1 U200_U_LedMatrixPixel47.5 | length 7.9
  Top Layer w0.254: v1(23,17.875) U200_U_LedMatrixPixel47.5@23.656,17.875
  Bottom Layer w0.254: v1(23,17.875) 23,20.5 23.871,21.371 24.461,21.371 24.61,21.52 24.61,23.096 R201_U_LedMatrixPixel40.1@23.881,23.825
NetR201_U_LedMatrixPixel40_2: R201_U_LedMatrixPixel40.2 U200_U_LedMatrixPixel40.2 | length 1.8
  Top Layer w0.2: v1@21.527,23.102 v1(21.6,23.102) 21.827,22.875 U200_U_LedMatrixPixel40.2@22.256,22.875
  Bottom Layer w0.2: v1(21.6,23.102) 21.6,23.181 21.528,23.253 22.031,23.756 R201_U_LedMatrixPixel40.2@22.031,23.825
NetR201_U_LedMatrixPixel41_1: R201_U_LedMatrixPixel41.1 U200_U_LedMatrixPixel48.5 | length 7.9
  Top Layer w0.254: v1(28,17.875) U200_U_LedMatrixPixel48.5@28.656,17.875
  Bottom Layer w0.254: v1(28,17.875) 28,20.5 28.871,21.371 29.461,21.371 29.61,21.52 29.61,23.096 R201_U_LedMatrixPixel41.1@28.881,23.825
NetR201_U_LedMatrixPixel41_2: R201_U_LedMatrixPixel41.2 U200_U_LedMatrixPixel41.2 | length 1.8
  Top Layer w0.2: v1@26.527,23.102 v1(26.6,23.102) 26.827,22.875 U200_U_LedMatrixPixel41.2@27.256,22.875
  Bottom Layer w0.2: v1(26.6,23.102) 26.6,23.181 26.528,23.253 27.031,23.756 R201_U_LedMatrixPixel41.2@27.031,23.825
NetR201_U_LedMatrixPixel42_1: R201_U_LedMatrixPixel42.1 U200_U_LedMatrixPixel49.5 | length 7.9
  Top Layer w0.254: v1(33,17.875) U200_U_LedMatrixPixel49.5@33.656,17.875
  Bottom Layer w0.254: v1(33,17.875) 33,20.5 33.871,21.371 34.461,21.371 34.61,21.52 34.61,23.096 R201_U_LedMatrixPixel42.1@33.881,23.825
NetR201_U_LedMatrixPixel42_2: R201_U_LedMatrixPixel42.2 U200_U_LedMatrixPixel42.2 | length 1.8
  Top Layer w0.2: v1@31.527,23.102 v1(31.6,23.102) 31.827,22.875 U200_U_LedMatrixPixel42.2@32.256,22.875
  Bottom Layer w0.2: v1(31.6,23.102) 31.6,23.181 31.528,23.253 32.031,23.756 R201_U_LedMatrixPixel42.2@32.031,23.825
NetR201_U_LedMatrixPixel43_1: R201_U_LedMatrixPixel43.1 U102.4 | length 8.3
  Bottom Layer w0.254: R201_U_LedMatrixPixel43.1@3.881,18.825 4.61,18.096 4.61,11.991 U102.4@5.456,11.145
NetR201_U_LedMatrixPixel43_2: R201_U_LedMatrixPixel43.2 U200_U_LedMatrixPixel43.2 | length 1.8
  Top Layer w0.2: v1@1.527,18.102 v1(1.6,18.102) 1.827,17.875 U200_U_LedMatrixPixel43.2@2.256,17.875
  Bottom Layer w0.2: v1(1.6,18.102) 1.6,18.181 1.528,18.253 2.031,18.756 R201_U_LedMatrixPixel43.2@2.031,18.825
NetR201_U_LedMatrixPixel44_2: R201_U_LedMatrixPixel44.2 U200_U_LedMatrixPixel44.2 | length 1.8
  Top Layer w0.2: v1@6.527,18.102 v1(6.6,18.102) 6.827,17.875 U200_U_LedMatrixPixel44.2@7.256,17.875
  Bottom Layer w0.2: v1(6.6,18.102) 6.6,18.181 6.528,18.253 7.031,18.756 R201_U_LedMatrixPixel44.2@7.031,18.825
NetR201_U_LedMatrixPixel45_2: R201_U_LedMatrixPixel45.2 U200_U_LedMatrixPixel45.2 | length 1.8
  Top Layer w0.2: v1@11.527,18.102 v1(11.6,18.102) 11.827,17.875 U200_U_LedMatrixPixel45.2@12.256,17.875
  Bottom Layer w0.2: v1(11.6,18.102) 11.6,18.181 11.528,18.253 12.031,18.756 R201_U_LedMatrixPixel45.2@12.031,18.825
NetR201_U_LedMatrixPixel46_2: R201_U_LedMatrixPixel46.2 U200_U_LedMatrixPixel46.2 | length 1.8
  Top Layer w0.2: v1@16.527,18.102 v1(16.6,18.102) 16.827,17.875 U200_U_LedMatrixPixel46.2@17.256,17.875
  Bottom Layer w0.2: v1(16.6,18.102) 16.6,18.181 16.528,18.253 17.031,18.756 R201_U_LedMatrixPixel46.2@17.031,18.825
NetR201_U_LedMatrixPixel47_2: R201_U_LedMatrixPixel47.2 U200_U_LedMatrixPixel47.2 | length 1.8
  Top Layer w0.2: v1@21.527,18.102 v1(21.6,18.102) 21.827,17.875 U200_U_LedMatrixPixel47.2@22.256,17.875
  Bottom Layer w0.2: v1(21.6,18.102) 21.6,18.181 21.528,18.253 22.031,18.756 R201_U_LedMatrixPixel47.2@22.031,18.825
NetR201_U_LedMatrixPixel48_2: R201_U_LedMatrixPixel48.2 U200_U_LedMatrixPixel48.2 | length 1.8
  Top Layer w0.2: v1@26.527,18.102 v1(26.6,18.102) 26.827,17.875 U200_U_LedMatrixPixel48.2@27.256,17.875
  Bottom Layer w0.2: v1(26.6,18.102) 26.6,18.181 26.528,18.253 27.031,18.756 R201_U_LedMatrixPixel48.2@27.031,18.825
NetR201_U_LedMatrixPixel49_2: R201_U_LedMatrixPixel49.2 U200_U_LedMatrixPixel49.2 | length 1.8
  Top Layer w0.2: v1@31.527,18.102 v1(31.6,18.102) 31.827,17.875 U200_U_LedMatrixPixel49.2@32.256,17.875
  Bottom Layer w0.2: v1(31.6,18.102) 31.6,18.181 31.528,18.253 32.031,18.756 R201_U_LedMatrixPixel49.2@32.031,18.825
NetU200_U_LedMatrixPixel7_5: U200_U_LedMatrixPixel7.5
NetU200_U_LedMatrixPixel7_6: U200_U_LedMatrixPixel7.6
nRST: C103.2 R100.1 R101.2 U100.19 | length 10.4
  Top Layer w0.254: v1@27.796,11.325 v1(27.856,11.325) 32.836,11.325 v1(33.156,11.645)
  Bottom Layer w0.254: v1(27.856,11.325) 27.776,11.325 28.206,10.895 U100.19@28.206,10.295 ; C103.2@32.356,12.27 32.981,11.645 v1(33.156,11.645) ; R101.2@32.9,10.4 33.156,10.656 v1(33.156,11.645) ; R101.2@33,10.25 R101.2@33.025,10.275 ; R100.1@34.056,12.27 33.431,11.645 v1(33.156,11.645)
nRSTE: J100.5 R101.1 | length 7.5
  Bottom Layer w0.254: J100.5@33.95,3.66 34.414,3.66 34.904,4.15 34.904,10.246 R101.1@34.75,10.4
SDO8: R200_U_LedMatrixPixel44.1 U200_U_LedMatrixPixel1.6 | length 38
  Top Layer w0.254: U200_U_LedMatrixPixel1.6@3.656,48.625 3.956,48.925 v1(5.175,48.925)
  Bottom Layer w0.2: v1(5.175,48.925) 5.35,48.925 5.779,48.496 5.779,46.265 5.3,45.787 5.3,17.521 6.527,16.294 8.05,16.294 R200_U_LedMatrixPixel44.1@8.881,17.125
SDO16: R200_U_LedMatrixPixel45.1 U200_U_LedMatrixPixel2.6 | length 38.1
  Top Layer w0.254: U200_U_LedMatrixPixel2.6@8.656,48.625 9.056,49.025 v1(10.175,49.025)
  Bottom Layer w0.2: v1(10.175,49.025) 10.25,49.025 10.779,48.496 10.779,46.265 10.302,45.788 10.302,17.52 11.527,16.294 13.05,16.294 R200_U_LedMatrixPixel45.1@13.881,17.125
SDO24: R200_U_LedMatrixPixel46.1 U200_U_LedMatrixPixel3.6 | length 38
  Top Layer w0.254: U200_U_LedMatrixPixel3.6@13.656,48.625 14.081,49.05 v1(15.2,49.05)
  Bottom Layer w0.2: v1(15.2,49.05) 15.225,49.05 15.779,48.496 15.779,46.265 15.302,45.788 15.302,17.52 16.424,16.398 18.154,16.398 R200_U_LedMatrixPixel46.1@18.881,17.125
SDO32: R200_U_LedMatrixPixel47.1 U200_U_LedMatrixPixel4.6 | length 38.2
  Top Layer w0.254: U200_U_LedMatrixPixel4.6@18.656,48.625 19.081,49.05 v1(20.275,49.05)
  Bottom Layer w0.2: v1(20.275,49.05) 20.779,48.546 20.779,46.265 20.295,45.782 20.295,17.526 21.527,16.294 23.05,16.294 R200_U_LedMatrixPixel47.1@23.881,17.125
SDO40: R200_U_LedMatrixPixel48.1 U200_U_LedMatrixPixel5.6 | length 38.1
  Top Layer w0.254: U200_U_LedMatrixPixel5.6@23.656,48.625 24.081,49.05 v1(25.225,49.05)
  Bottom Layer w0.2: v1(25.225,49.05) 25.779,48.496 25.779,46.265 25.295,45.782 25.295,17.526 26.527,16.294 28.05,16.294 R200_U_LedMatrixPixel48.1@28.881,17.125
SDO48: R200_U_LedMatrixPixel49.1 U200_U_LedMatrixPixel6.6 | length 38.1
  Top Layer w0.254: U200_U_LedMatrixPixel6.6@28.656,48.625 29.056,49.025 v1(30.175,49.025)
  Bottom Layer w0.2: v1(30.175,49.025) 30.25,49.025 30.779,48.496 30.779,46.265 30.295,45.782 30.295,17.526 31.527,16.294 33.05,16.294 R200_U_LedMatrixPixel49.1@33.881,17.125
SWCLK: J100.2 U100.24 | length 6.3
  Bottom Layer w0.254: U100.24@30.706,10.295 30.706,10.806 30.8,10.9 31.731,10.9 32.171,10.46 32.171,9.795 32.654,9.312 32.654,8.202 33.386,7.47 J100.2@33.95,7.47
SWDIO: J100.4 U100.1 | length 6.3
  Bottom Layer w0.254: U100.1@31.356,9.645 31.79,9.645 31.79,9.637 32.162,9.265 32.162,6.338 33.57,4.93 J100.4@33.95,4.93
pads on no net: J101.0 J101.2 J101.6 J101.7 U100.2 U100.3 U100.4 U100.5 U100.6 U100.7 U100.10 U100.11 U100.12 U100.15 U100.16 U100.22 U100.25
copper on no net:
  other v2: 28.906,7.845 30.006,7.845 28.906,8.945 30.006,8.945

## Polygon pours and split planes (outlines as drawn)
GND on Top Layer "Top Layer-No Net" (solid, remove dead copper, pour order 0): 0,54 35.75,54 35.912,0 0,0
GND on Bottom Layer "Bottom Layer-No Net" (solid, remove dead copper, pour order 2): 0,54 35.75,54 35.912,0 0,0

## Other copper
Multi-Layer:
  lines w0.254: 34.407,0 1.5,0 cw(c1.5,1.5) 0,1.5 0,51.5 cw(c1.5,51.5) 1.5,53 34.425,53 ; 34.431,53 cw(c34.431,51.5) 35.931,51.5 35.931,1.5 ; 34.432,0 ccw(c34.432,1.5) 35.933,1.5

## Silkscreen, mask and mechanical layers (free items; w line width, h text height)
Top Overlay:
  drawing of 252 lines, arcs and shapes, not listed
  text "r" at 27.825,1.55 h4
Bottom Overlay:
  text "2020 / 02.28" at 9.575,0.2 h1

## Dimensions
34.425,53 to 34.407,0 on Mechanical 1
0,51.5 to 35.931,51.5 on Mechanical 1